# Altium PCB ECG BT&USB 12ch Ver.2.02.PcbDoc (part 1 of 2)
Units mil, origin at the board's own origin, x right, y up, seen from the top; angles counter-clockwise.
Board outline 2150 x 3445 mil, 4 copper layers (Top Layer, Mid-Layer 1, Mid-Layer 2, Bottom Layer), stack 58.2 mil thick; 151 components, 108 nets, 584 pads, 430 vias.
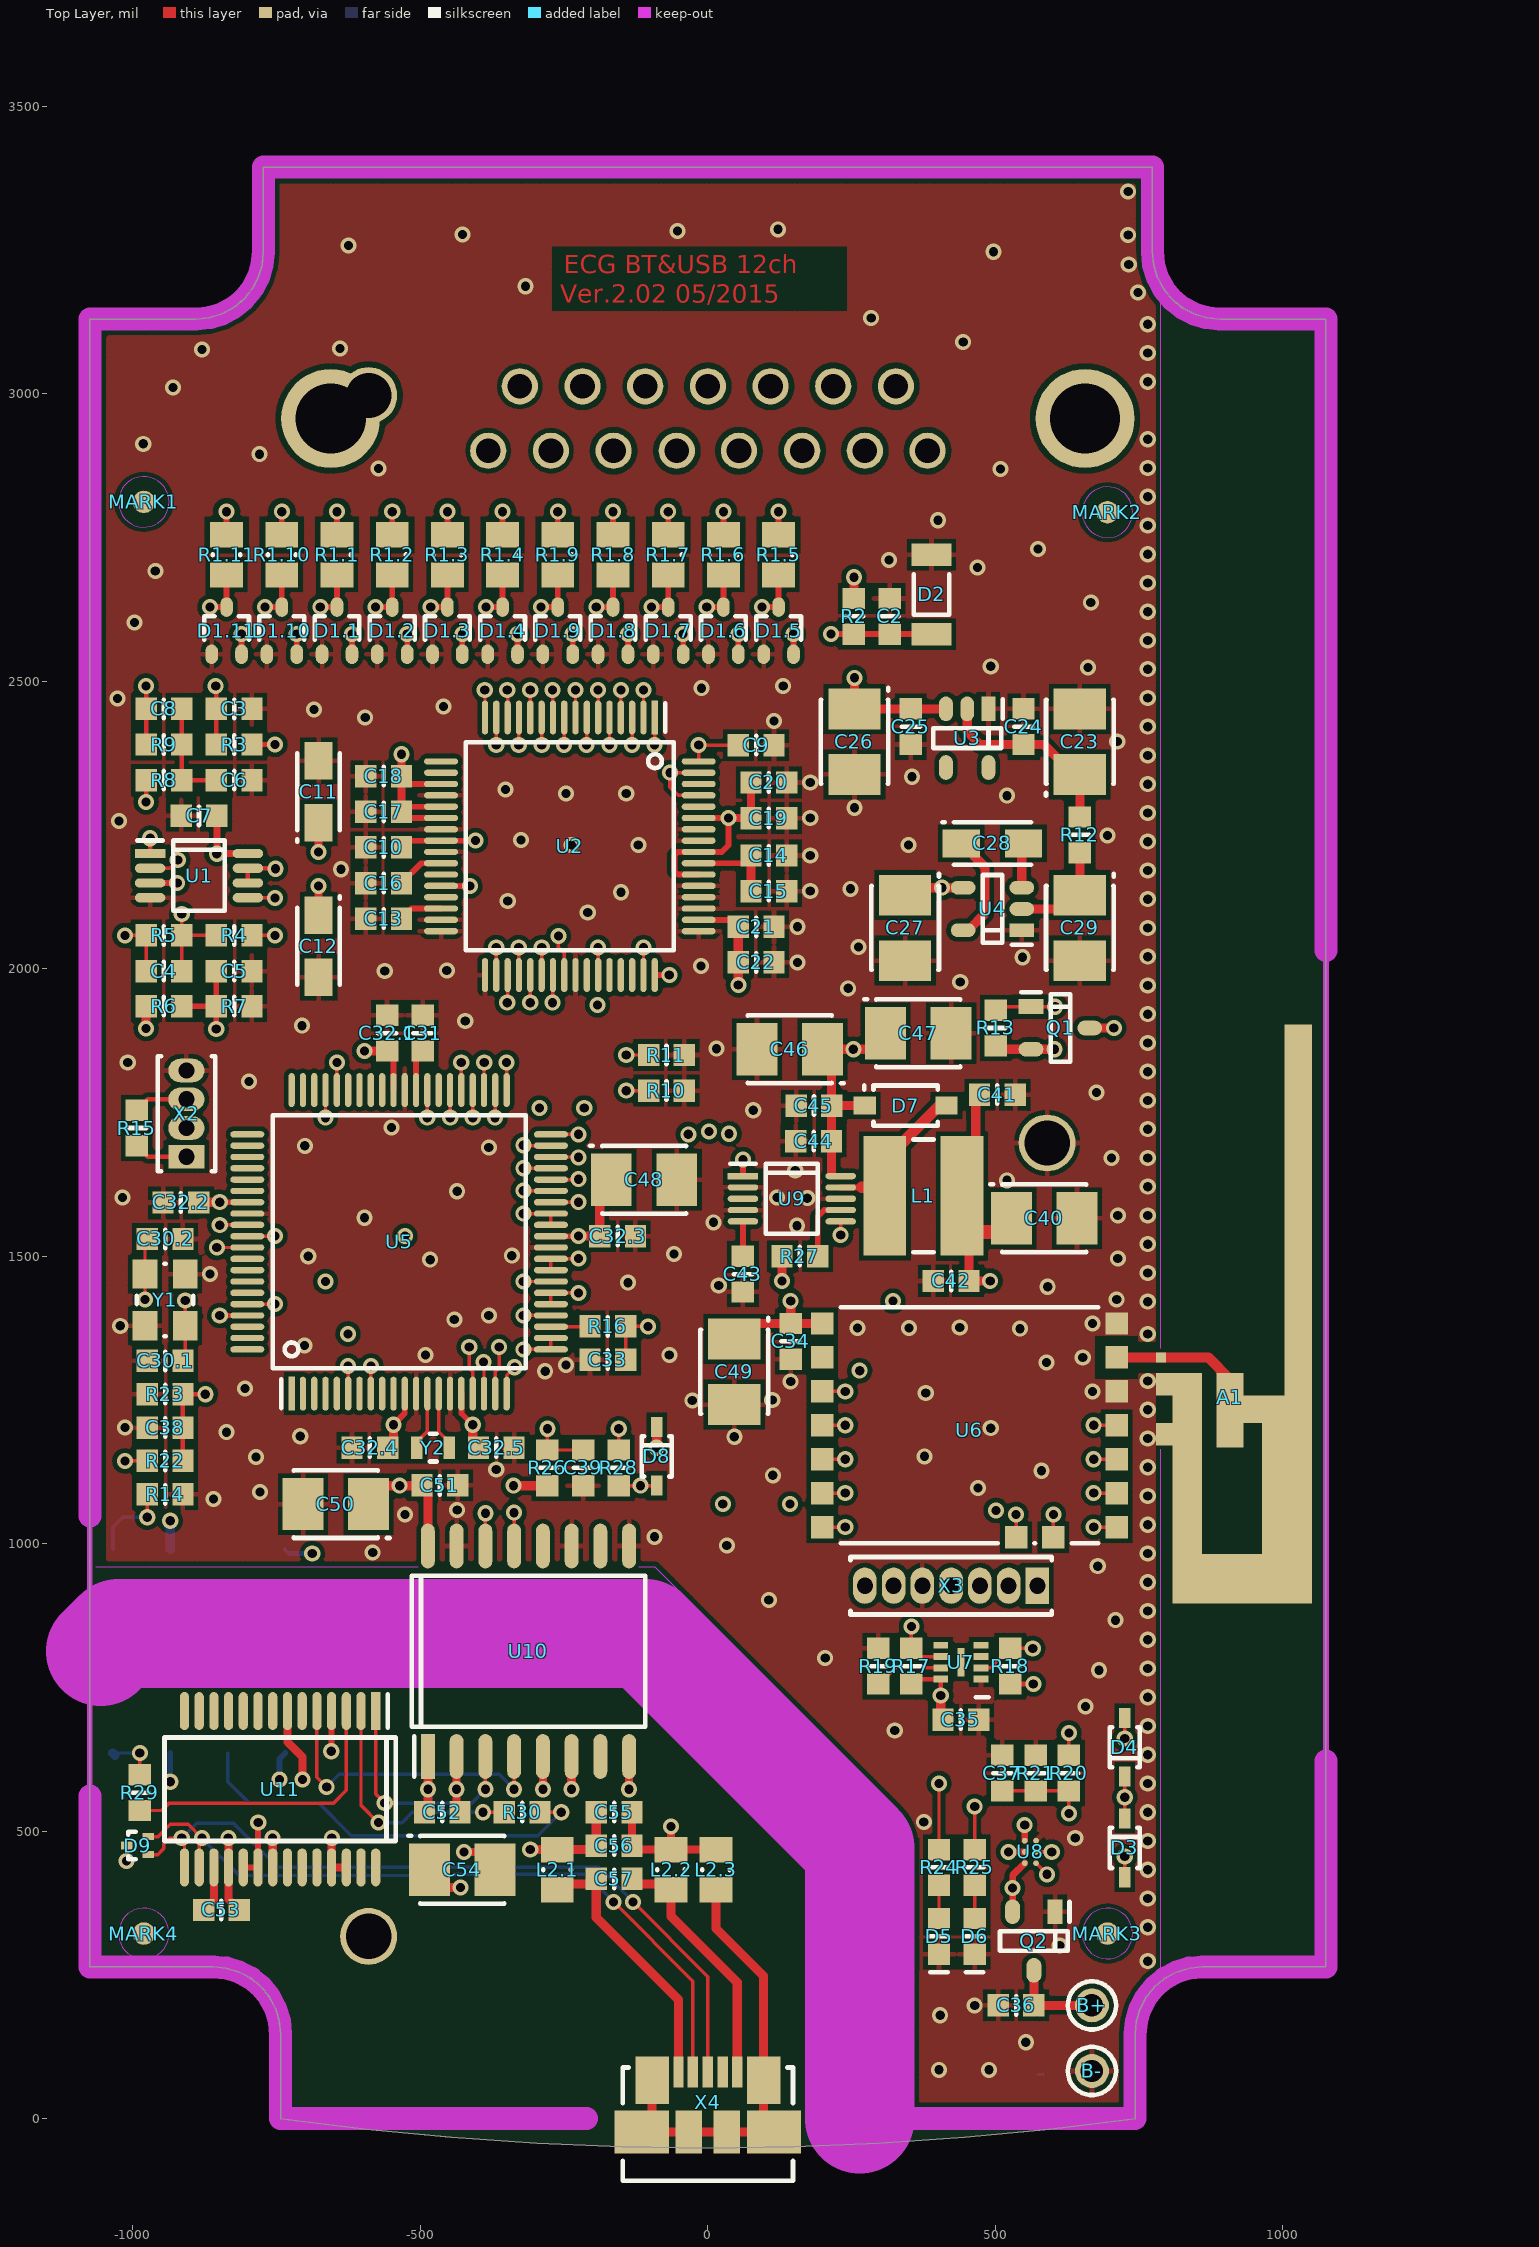
[diagram p0: Top Layer view]
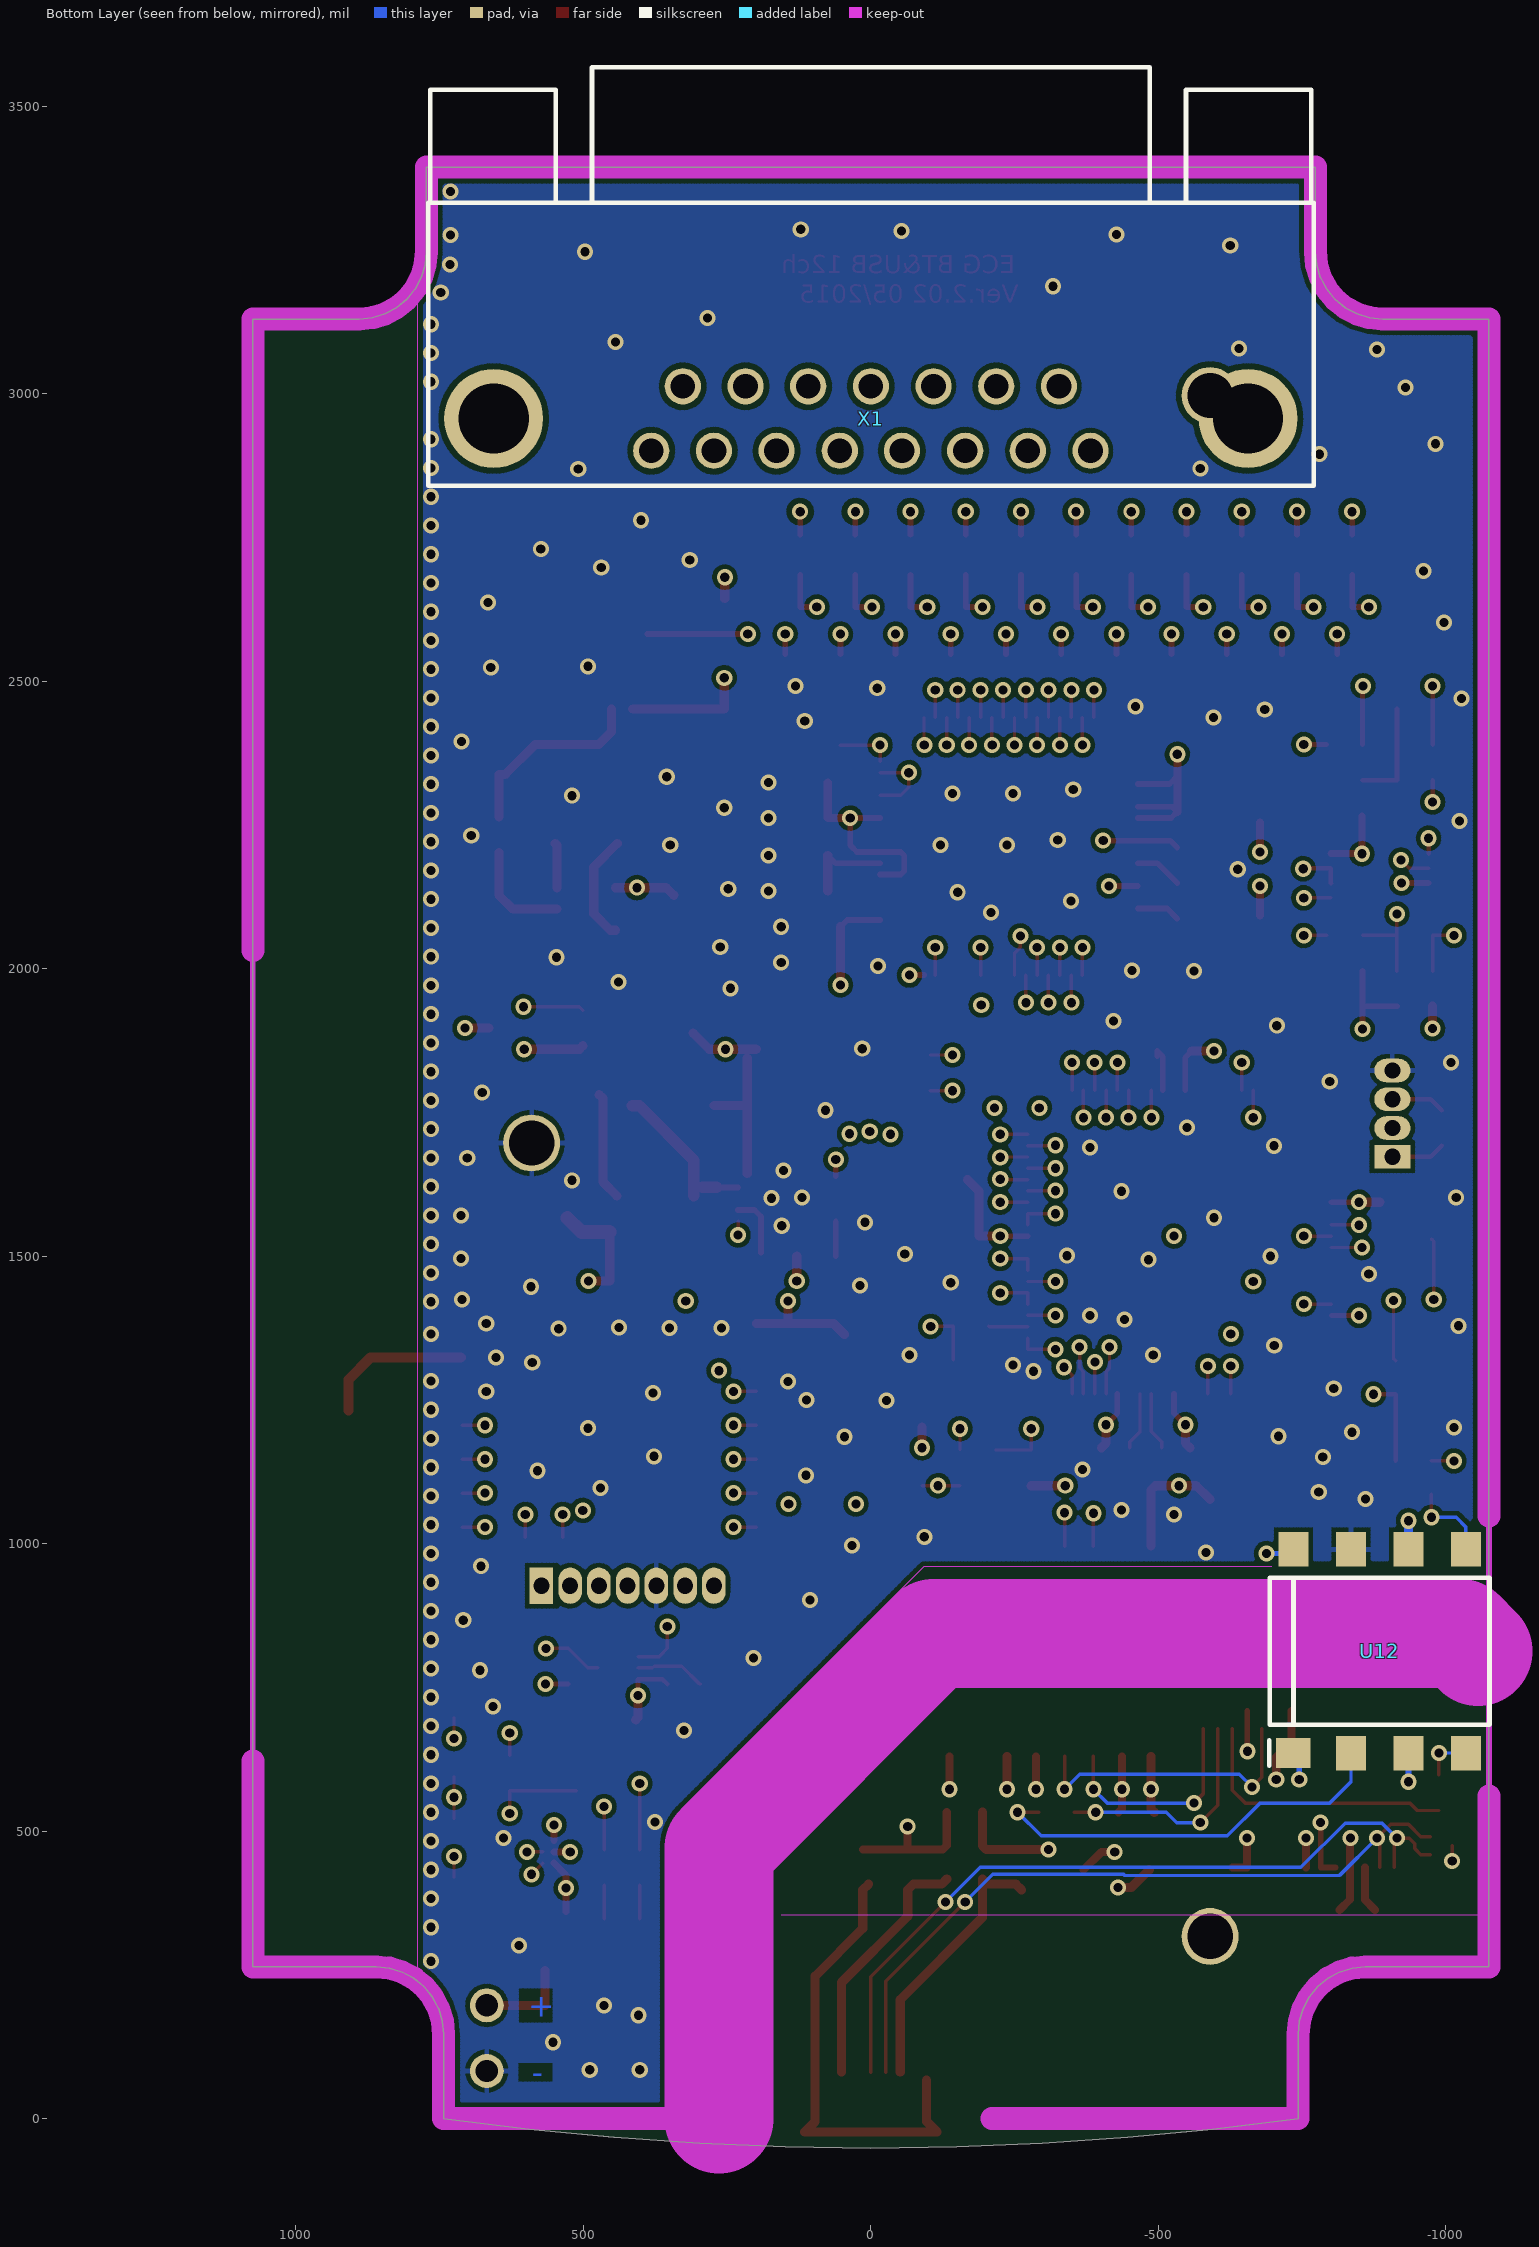
[diagram p1: Bottom Layer view, seen from below]
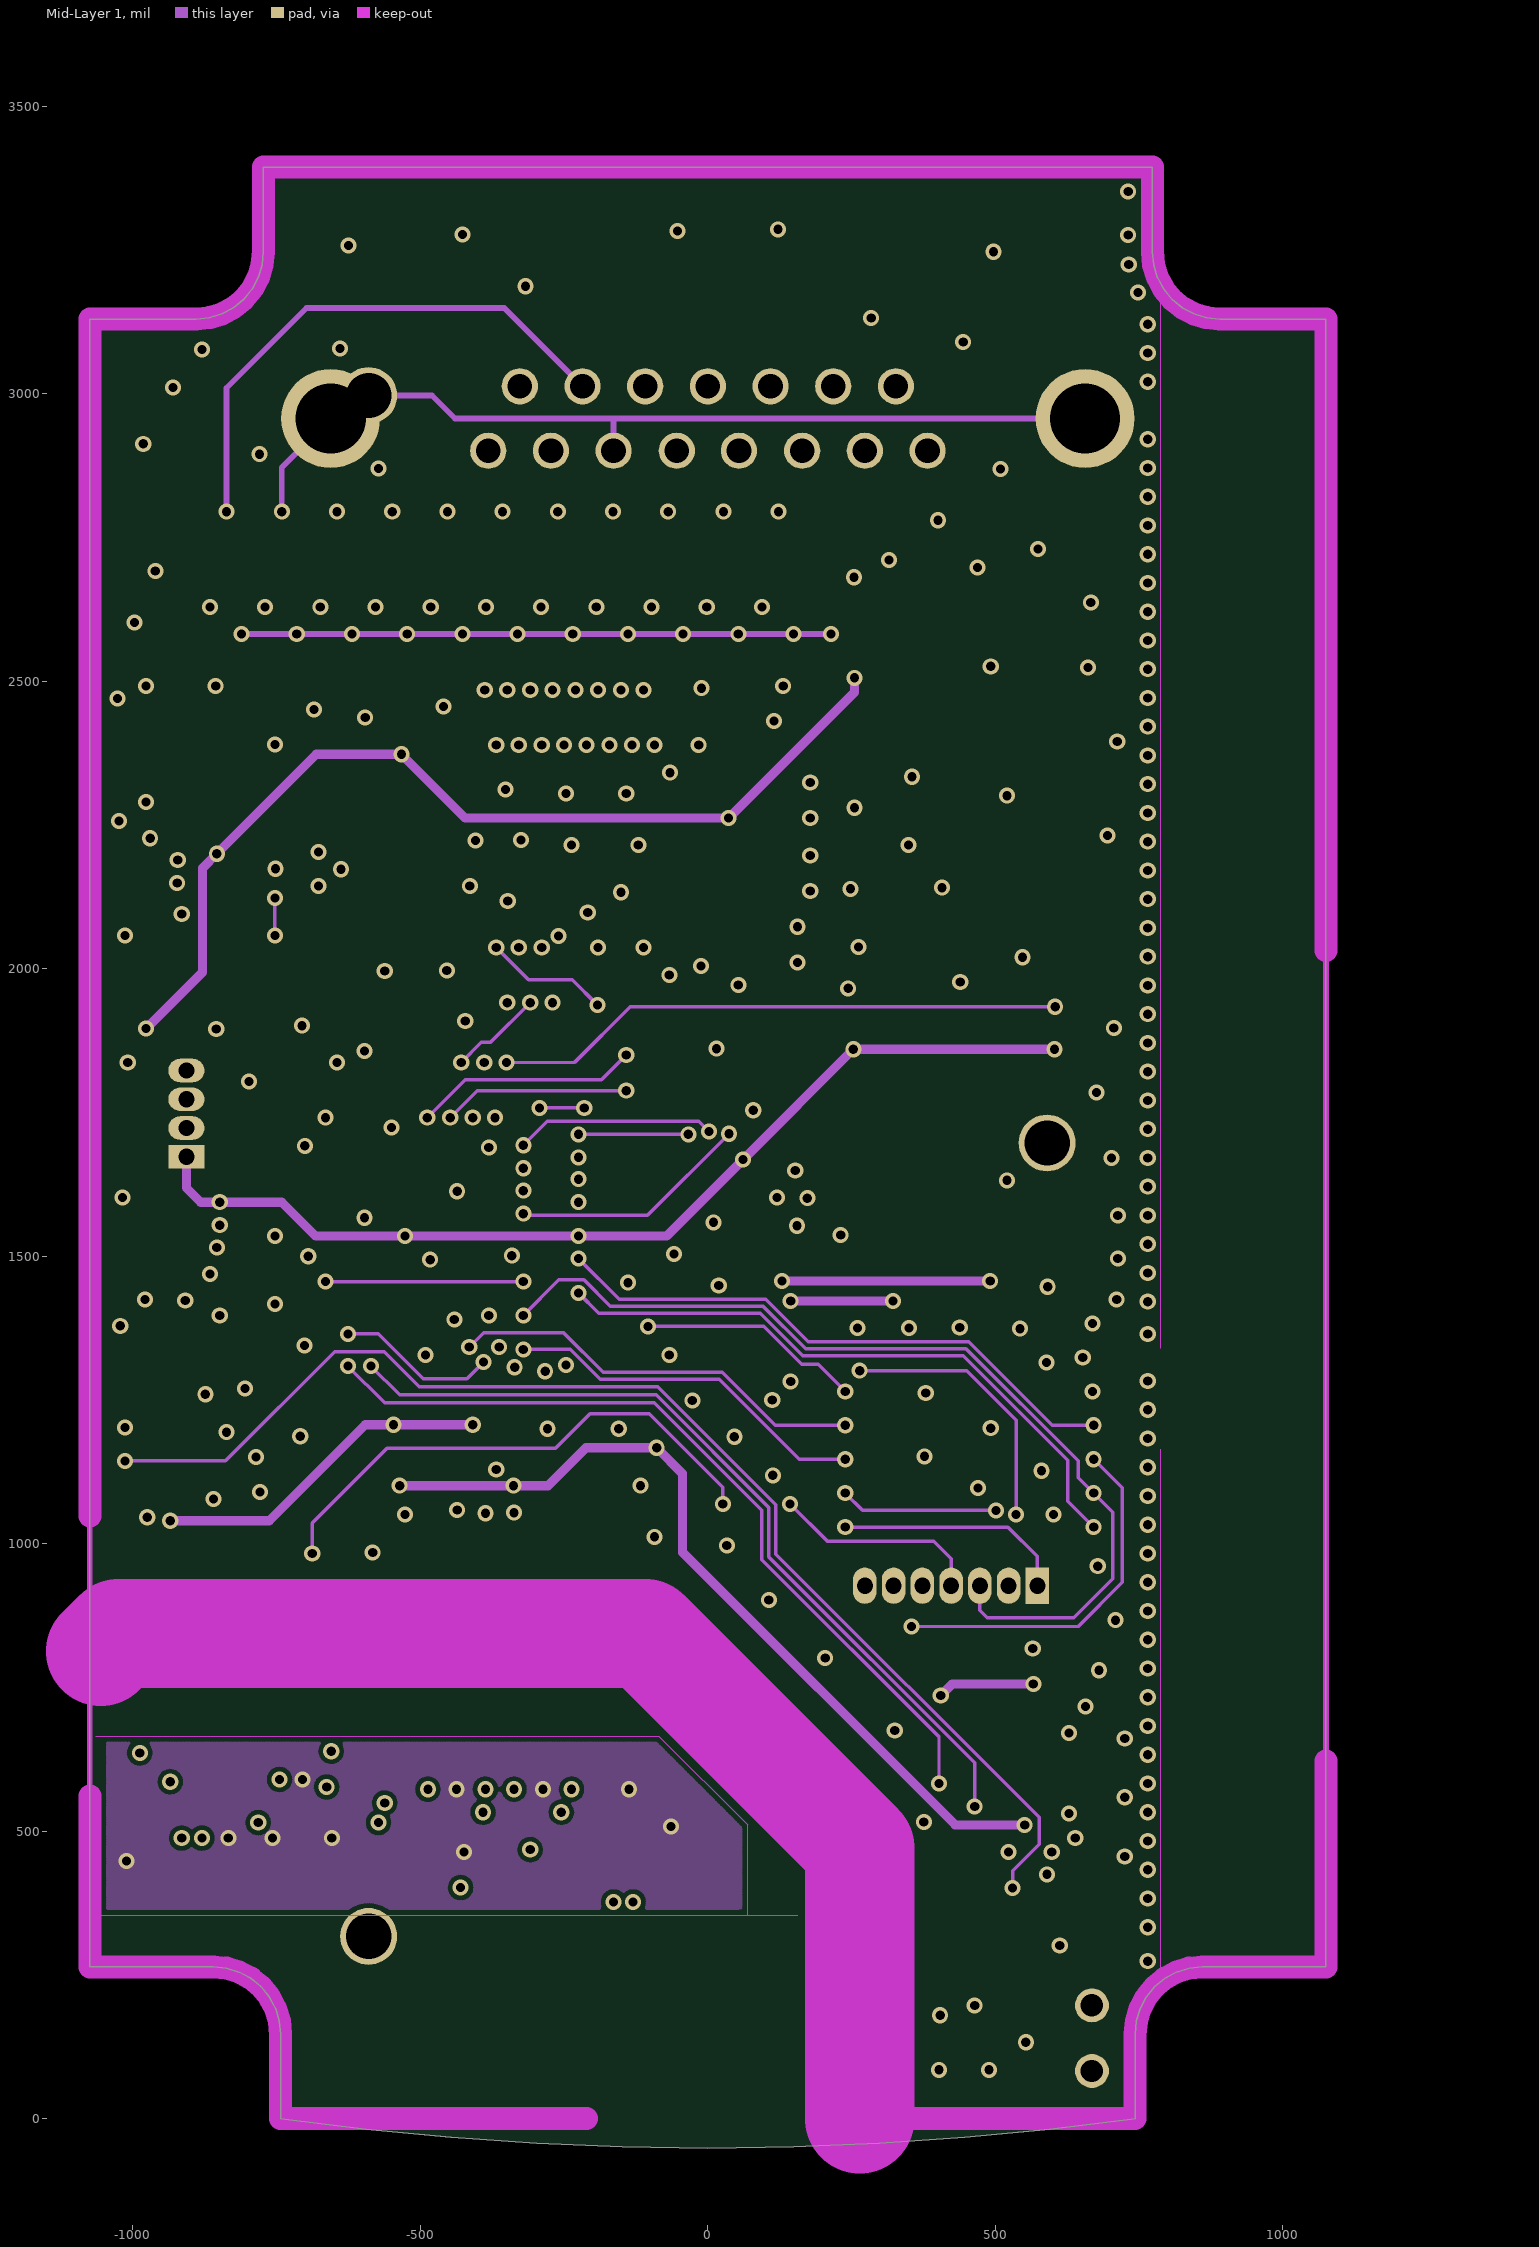
[diagram p2: Mid-Layer 1]
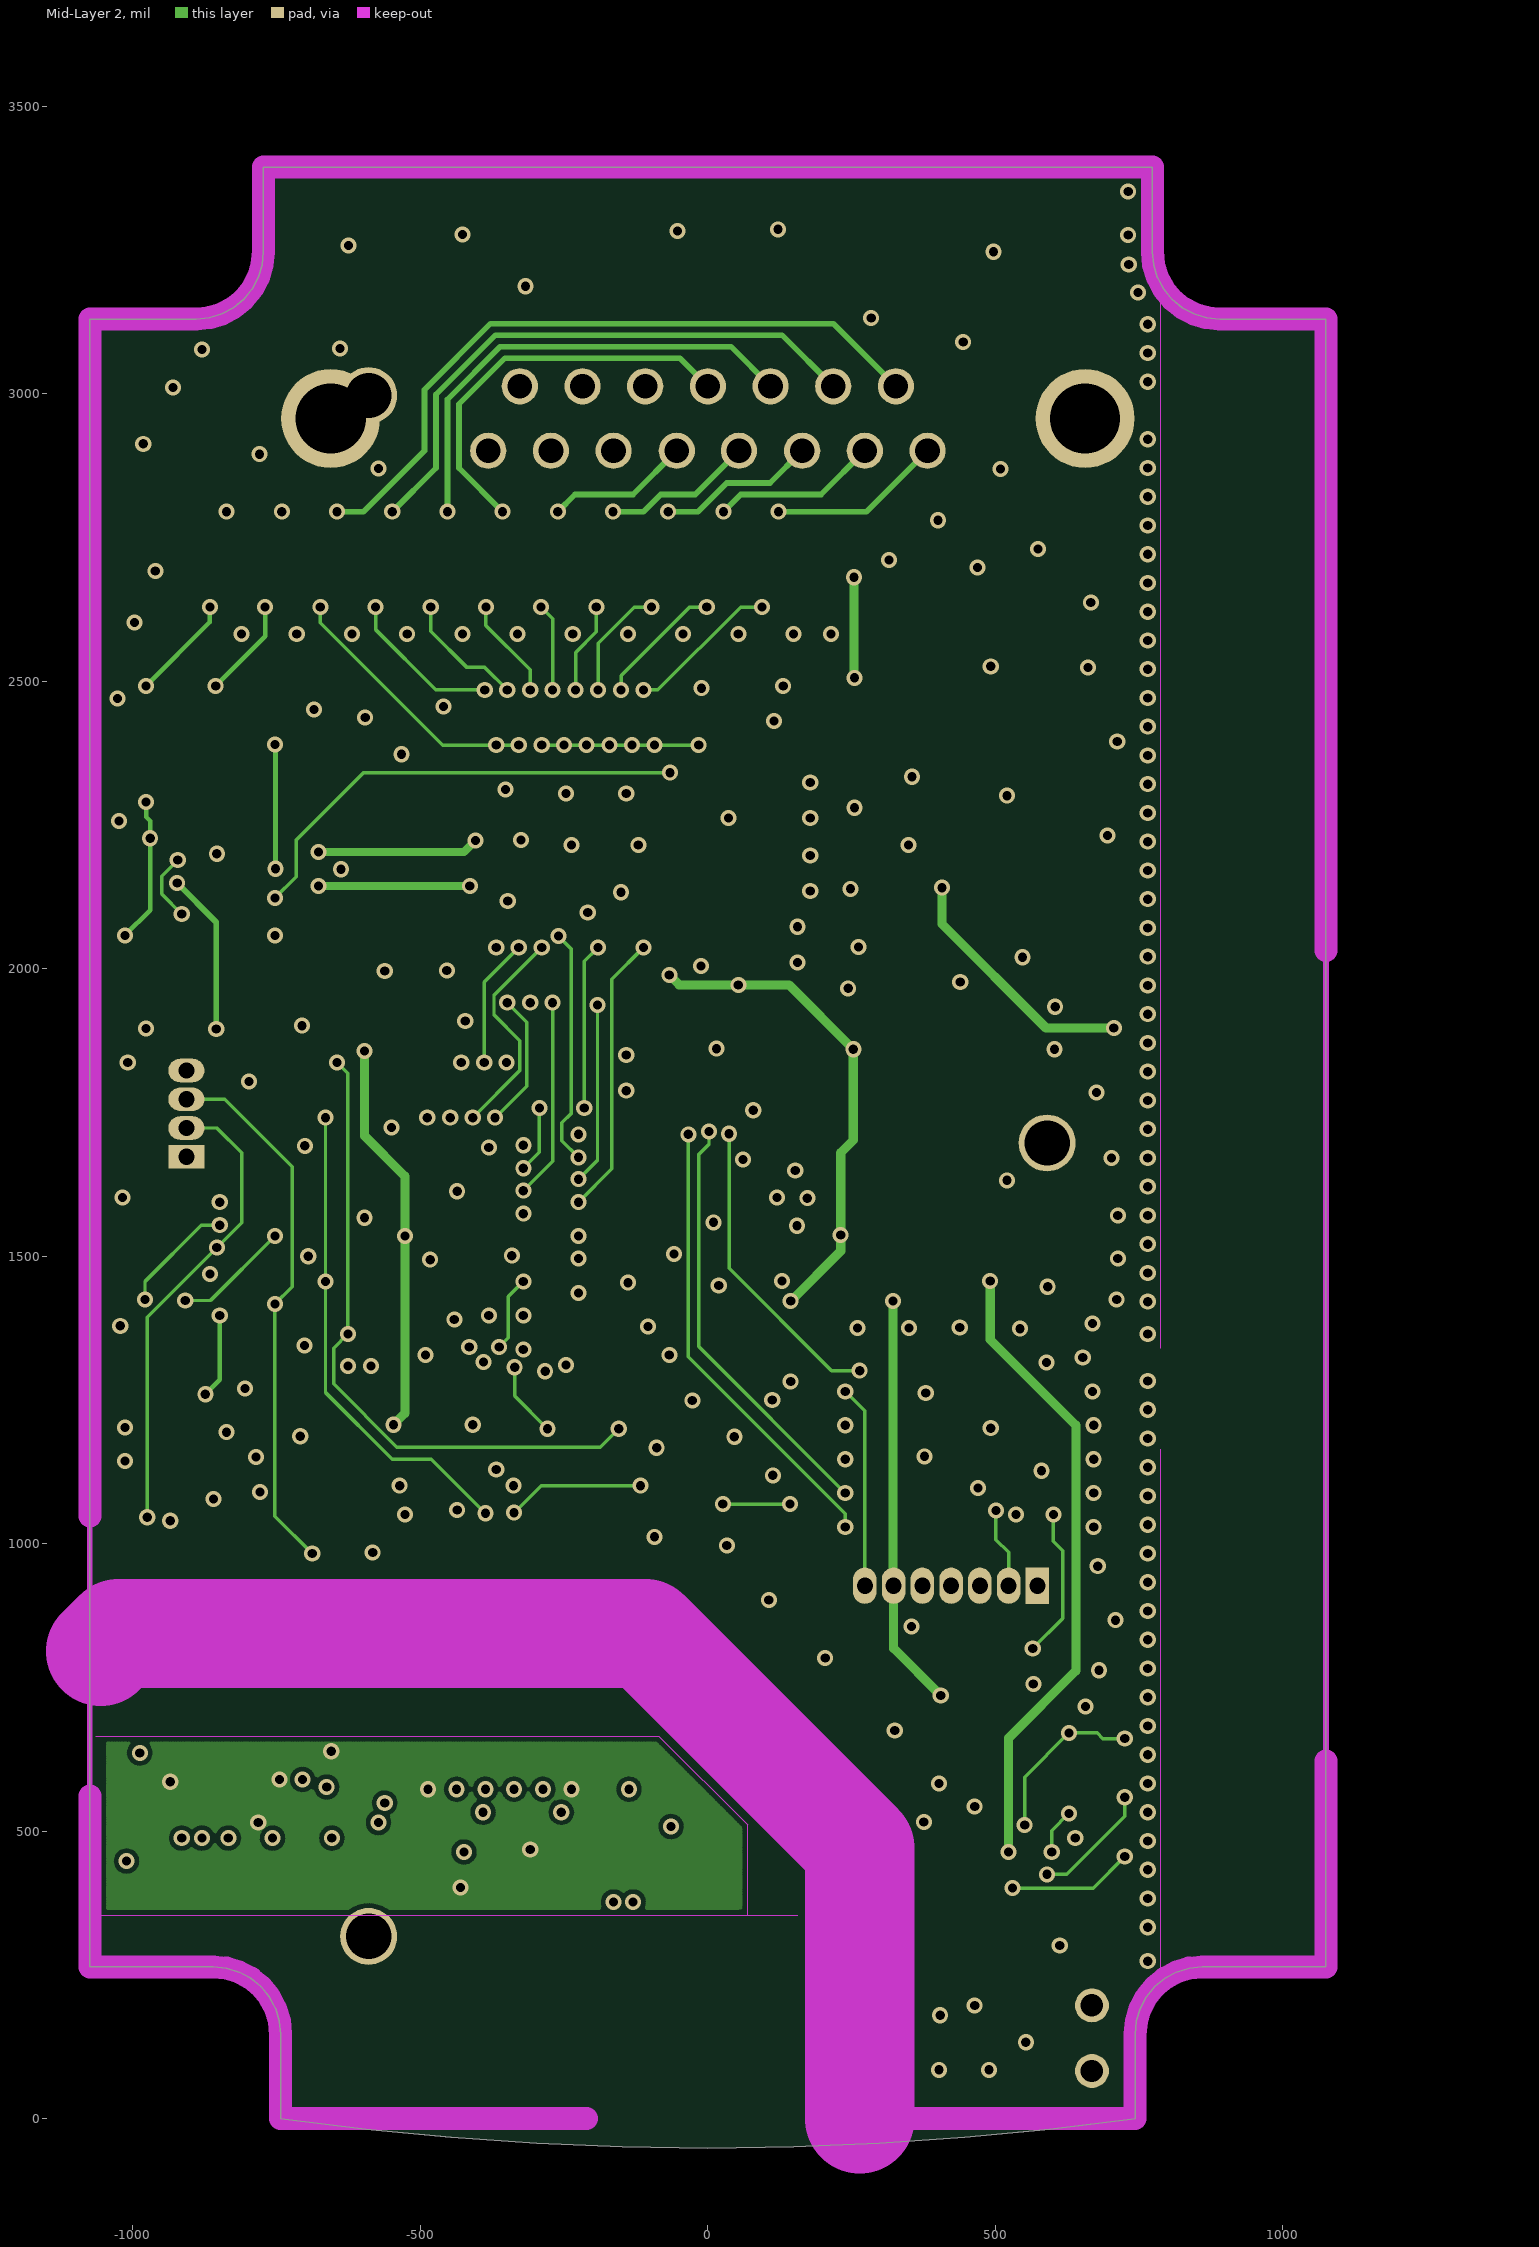
[diagram p3: Mid-Layer 2]
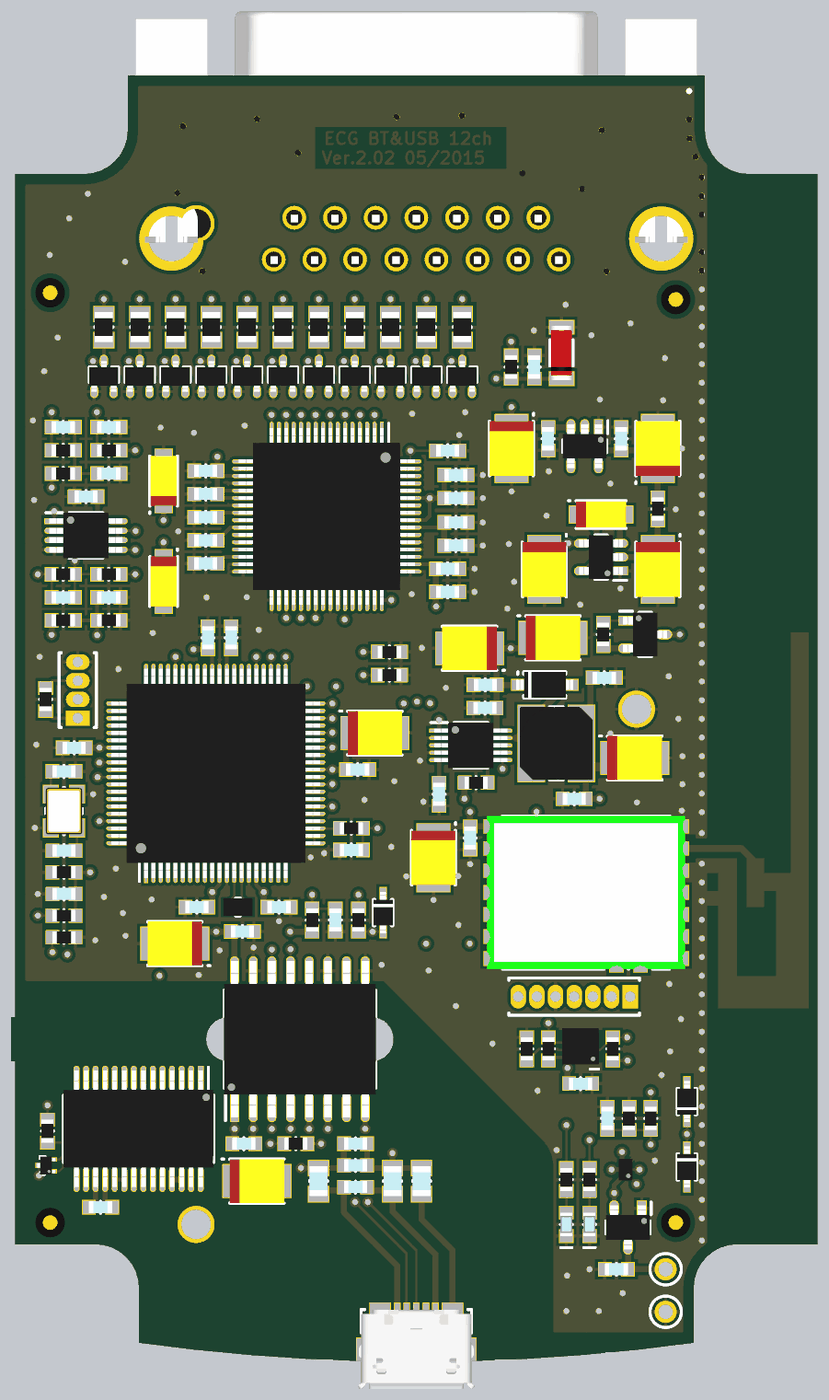
[diagram p5: 3D render of the assembled board from above, using the file's embedded part models]

## Layer stack, top to bottom
Top Layer: signal copper 1.4
Dielectric: core 17, FR-4, Dk 4.8
Mid-Layer 1: signal copper 1.4
Dielectric: prepreg 18.6, FR-4, Dk 4.8
Mid-Layer 2: signal copper 1.4
Dielectric: core 17, FR-4, Dk 4.8
Bottom Layer: signal copper 1.4

## Board outline
-773,3394 -773,3247 -775.25,3224.17 -781.91,3202.23 -792.72,3182 -807.27,3164.27 -825,3149.72 -845.23,3138.91 -867.18,3132.25 -890,3130 -1075,3130 -1075,264 -860,264 -837.18,261.75 -815.23,255.09 -795,244.28 -777.27,229.73 -762.72,212 -751.91,191.77 -745.25,169.82 -743,147 -743,0 -595.07,-18.34 -446.7,-32.62 -297.98,-42.83 -149.05,-48.96 0,-51 149.05,-48.96 297.98,-42.83 446.69,-32.62 595.07,-18.34 743,0 743,147 745.25,169.82 751.91,191.77 762.72,212 777.27,229.73 795,244.28 815.23,255.09 837.17,261.75 860,264 1075,264 1075,3130 890,3130 867.17,3132.25 845.23,3138.91 825,3149.72 807.27,3164.27 792.72,3182 781.91,3202.23 775.25,3224.17 773,3247 773,3394
cut-out: -1086,872 -705,872 -694,871 -683,868 -672,862 -663,855 -656,846 -650,835 -647,824 -646,813 -647,800 -651,788 -656,780 -662,772 -672,764 -681,759 -694,755 -705,754 -1086,754
cut-out: -504,872 -516,871 -528,867 -537,862 -546,855 -553,846 -559,835 -562,823 -563,813 -562,800 -558,789 -553,780 -546,771 -537,764 -526,758 -515,755 -504,754 -120,754 -109,755 -98,758 -88,763 -79,770 -72,778 -66,789 -62,800 -61,813 -62,824 -65,835 -71,846 -80,857 -89,863 -98,868 -109,871 -120,872

## Design rules (kind name [scope] priority, off if disabled: settings)
Clearance ClearanceRF [InNetClass('RFnet') vs InNamedPolygon('TOPGND')] p1: gap=18
Clearance ClearanceIN [InNetClass('INnet')] p2: gap=10
Clearance ClearanceOUT [InNetClass('OUTnet')] p3: gap=8
Clearance ClearancePoligon [InPolygon] p4: gap=8
Clearance [All] p5: gap=6
HoleSize [All] p1: absolutevalues=TRUE maxlimit=1000 minlimit=16 maxpercent=80.000 minpercent=20.000
HoleToHoleClearance [All] p1: gap=0 allowstackedmicrovias=TRUE
MinimumSolderMaskSliver [All] p1: minsoldermaskwidth=6
PolygonConnect PolygonConnectBGA [HasFootprint('SMD/BGA6/1.46x0.96MM/0.5MMP/0.25MMBALL/0.625MMH')] p1: connectstyle=Relief reliefconductorwidth=10 reliefentries=4 polygonreliefangle="45 Angle" airgapwidth=10
PolygonConnect PolygonConnecAnt [(InPadClass('RF GND'))] p2: connectstyle=Direct reliefconductorwidth=10 reliefentries=4 polygonreliefangle="90 Angle" airgapwidth=10
PolygonConnect [(InPadClass('All Pads'))] p3: connectstyle=Relief reliefconductorwidth=8 reliefentries=4 polygonreliefangle="90 Angle" airgapwidth=8
PolygonConnect PolygonConnectVia [All] p4: connectstyle=Direct reliefconductorwidth=10 reliefentries=4 polygonreliefangle="90 Angle" airgapwidth=10
RoomDefinition "RLD and screen" [InComponentClass('RLD and screen')] p1: confinementstyle=ConfineIn formatcopy=TRUE lockcomponents=FALSE outline -738,1881 -738,2517 -1028,2517 -1028,1881
RoomDefinition "Input protect power" [InComponentClass('Input protect power')] p2: confinementstyle=ConfineIn formatcopy=TRUE lockcomponents=FALSE outline 224,2552 434,2552 434,2750 224,2750
RoomDefinition "Input protect 11" [InComponentClass('Input protect 11')] p3: confinementstyle=ConfineIn formatcopy=TRUE lockcomponents=FALSE outline -886,2522 -788,2522 -788,2809 -886,2809
RoomDefinition "Input protect 10" [InComponentClass('Input protect 10')] p4: confinementstyle=ConfineIn formatcopy=TRUE lockcomponents=FALSE outline -790,2522 -692,2522 -692,2809 -790,2809
RoomDefinition "Input protect 9" [InComponentClass('Input protect 9')] p5: confinementstyle=ConfineIn formatcopy=TRUE lockcomponents=FALSE outline -310,2522 -212,2522 -212,2809 -310,2809
RoomDefinition "Input protect 8" [InComponentClass('Input protect 8')] p6: confinementstyle=ConfineIn formatcopy=TRUE lockcomponents=FALSE outline -214,2522 -116,2522 -116,2809 -214,2809
RoomDefinition "Input protect 7" [InComponentClass('Input protect 7')] p7: confinementstyle=ConfineIn formatcopy=TRUE lockcomponents=FALSE outline -118,2522 -20,2522 -20,2809 -118,2809
RoomDefinition "Input protect 6" [InComponentClass('Input protect 6')] p8: confinementstyle=ConfineIn formatcopy=TRUE lockcomponents=FALSE outline -22,2522 76,2522 76,2809 -22,2809
RoomDefinition "Input protect 5" [InComponentClass('Input protect 5')] p9: confinementstyle=ConfineIn formatcopy=TRUE lockcomponents=FALSE outline 74,2522 172,2522 172,2809 74,2809
RoomDefinition "Input protect 4" [InComponentClass('Input protect 4')] p10: confinementstyle=ConfineIn formatcopy=TRUE lockcomponents=FALSE outline -406,2522 -308,2522 -308,2809 -406,2809
RoomDefinition "Input protect 3" [InComponentClass('Input protect 3')] p11: confinementstyle=ConfineIn formatcopy=TRUE lockcomponents=FALSE outline -502,2522 -404,2522 -404,2809 -502,2809
RoomDefinition "Input protect 2" [InComponentClass('Input protect 2')] p12: confinementstyle=ConfineIn formatcopy=TRUE lockcomponents=FALSE outline -598,2522 -500,2522 -500,2809 -598,2809
RoomDefinition "Input protect 1" [InComponentClass('Input protect 1')] p13: confinementstyle=ConfineIn formatcopy=TRUE lockcomponents=FALSE outline -694,2522 -596,2522 -596,2809 -694,2809
RoutingVias [All] p1: holewidth=28 width=50 viastyle="Through Hole" minholewidth=16 minwidth=28 maxholewidth=80 maxwidth=100
SilkToSilkClearance [All] p1: silktosilkclearance=8
SilkToSolderMaskClearance [IsPad] p1: minsilkscreentomaskgap=8 clearancetoexposedcopper=TRUE
SolderMaskExpansion [All] p1: expansion=4
Width WidthIN [InNetClass('INnet')] p1: maxlimit=10 minlimit=10 preferedwidth=10
Width [All] p2: maxlimit=100 minlimit=6 preferedwidth=6
23 further rules are at their usual default settings.

## Classes and differential pairs
net class OUTnet: FOUT LOUT NOUT ROUT SCOUT V1OUT V2OUT V3OUT V4OUT V5OUT V6OUT
net class INnet: NetR1.1_1 NetR1.2_1 NetR1.3_1 NetR1.4_1 NetR1.5_1 NetR1.6_1 NetR1.7_1 NetR1.8_1 NetR1.9_1 NetR1.10_1 NetR1.11_1
component class "Main 12ch": MARK1 MARK2 MARK3 MARK4
component class "Input connector 12ch": X1
channel class "Input protect": "Input protect 1" "Input protect 2" "Input protect 3" "Input protect 4" "Input protect 5" "Input protect 6" "Input protect 7" "Input protect 8" "Input protect 9" "Input protect 10" "Input protect 11"
component class "RLD and screen": C3 C4 C5 C6 C7 C8 R3 R4 R5 R6 R7 R8 R9 U1
component class Processor: C30.1 C30.2 C31 C32.1 C32.2 C32.3 C32.4 C32.5 R14 R15 U5 X2 Y1 Y2
component class "Input protect power": C2 D2 R2
component class "Input protect 11": D1.11 R1.11
component class "Input protect 10": D1.10 R1.10
component class "Input protect 9": D1.9 R1.9
component class "Input protect 8": D1.8 R1.8
component class "Input protect 7": D1.7 R1.7
component class "Input protect 6": D1.6 R1.6
component class "Input protect 5": D1.5 R1.5
component class "Input protect 4": D1.4 R1.4
component class "Input protect 3": D1.3 R1.3
component class "Input protect 2": D1.2 R1.2
component class "Input protect 1": D1.1 R1.1
component class "ECG 12ch": C9 C10 C11 C12 C13 C14 C15 C16 C17 C18 C19 C20 C21 C22 R10 R11 U2
component class "Analog power": C23 C24 C25 C26 C27 C28 C29 Q1 R12 R13 U3 U4
component class Bluetooth: A1 C33 C34 C35 R16 R17 R18 R19 U6 U7 X3
component class USB: C50 C51 C52 C53 C54 C55 C56 C57 D8 D9 L2.1 L2.2 L2.3 R28 R29 R30 U10 U11 U12 X4
net class POWER: 5VIZO GND_IZO NetC53_2 NetC57_1 NetC57_2 NetL2.3_2
component class Power: B+ B- C36 C37 C38 C39 C40 C41 C42 C43 C44 C45 C46 C47 C48 C49 D3 D4 D5 D6 D7 L1 Q2 R20 R21 R22 R23 R24 R25 R26 R27 U8 U9
pad class "RF GND": A1-2 U6-5 U6-7
net class RFnet: NetA1_1

## Components (designator, comment, footprint, x,y, rotation, side; value= is the part's Value field where it differs from the comment)
A1 "F antenna" "PCB INVERTED F ANTENNA MIRROR" 1051,896 r270 top net-tie
B+ "TH HOLE" "1.0MM PAD" 668,197 r0 top
B- "TH HOLE" "1.0MM PAD" 668,83 r0 top
C2 "0.1u" SMD/C/0603 316,2613 r270 top
C3 "0.1u" SMD/C/0603 -824,2452 r180 top
C4 "10p" SMD/C/0603 -946,1996 r0 top
C5 "0.1u" SMD/C/0603 -824,1996 r180 top
C6 "0.1u" SMD/C/0603 -824,2328 r180 top
C7 "0.1u" SMD/C/0603 -885,2266 r0 top
C8 "0.1u" SMD/C/0603 -946,2452 r0 top
C9 "100p" SMD/C/0603 84,2389 r0 top
C10 "0.1u" SMD/C/0603 -564,2211 r0 top
C11 "22u 6.3V" SMD/C/TAJ-A -677,2308 r90 top
C12 "22u 6.3V" SMD/C/TAJ-A -677,2039 r270 top
C13 "1u" SMD/C/0603 -564,2087 r0 top
C14 "1u" SMD/C/0603 106,2197 r180 top
C15 "0.1u" SMD/C/0603 106,2135 r180 top
C16 "1u" SMD/C/0603 -564,2149 r0 top
C17 "0.1u" SMD/C/0603 -564,2273 r0 top
C18 "1u" SMD/C/0603 -564,2335 r0 top
C19 "0.1u" SMD/C/0603 106,2262 r180 top
C20 "1u" SMD/C/0603 106,2324 r180 top
C21 "0.1u" SMD/C/0603 84,2073 r180 top
C22 "1u" SMD/C/0603 84,2011 r180 top
C23 "47u 10V" SMD/C/TAJ-B 647,2395 r90 top
C24 "0.1u" SMD/C/0603 549,2421 r270 top
C25 "0.1u" SMD/C/0603 353,2421 r90 top
C26 "47u 10V" SMD/C/TAJ-B 255,2395 r270 top
C27 "47u 10V" SMD/C/TAJ-B 343,2071 r270 top
C28 "22u 6.3V" SMD/C/TAJ-A 495,2218 r0 top
C29 "47u 10V" SMD/C/TAJ-B 647,2071 r270 top
C30.1 "10p" SMD/C/0603 -944,1318 r0 top
C30.2 "10p" SMD/C/0603 -944,1530 r180 top
C31 "1u" SMD/C/0603 -496,1888 r270 top
C32.1 "0.1u" SMD/C/0603 -558,1888 r270 top
C32.2 "0.1u" SMD/C/0603 -916.5,1593.5 r0 top
C32.3 "0.1u" SMD/C/0603 -157,1535 r180 top
C32.4 "0.1u" SMD/C/0603 -588,1167 r0 top
C32.5 "0.1u" SMD/C/0603 -368,1167 r180 top
C33 "0.1u" SMD/C/0603 -174,1320 r0 top
C34 "1u" SMD/C/0603 144,1352 r90 top
C35 "0.1u" SMD/C/0603 440,694 r180 top
C36 "1u" SMD/C/0603 536,197 r0 top
C37 "2n" SMD/C/0603 512,601 r270 top
C38 "0.1u" SMD/C/0603 -944,1202 r0 top
C39 "10n" SMD/C/0603 -217,1132 r90 top
C40 "47u 10V" SMD/C/TAJ-B 585,1566 r0 top
C41 "1u" SMD/C/0603 503.5,1781 r180 top
C42 "0.1u" SMD/C/0603 423,1457 r0 top
C43 "0.1u" SMD/C/0603 61,1469 r270 top
C44 "0.1u" SMD/C/0603 184,1700 r0 top
C45 "1u" SMD/C/0603 184.5,1762 r0 top
C46 "47u 10V" SMD/C/TAJ-B 142.5,1860 r180 top
C47 "47u 10V" SMD/C/TAJ-B 366,1888 r0 top
C48 "47u 10V" SMD/C/TAJ-B -111,1633 r0 top
C49 "47u 10V" SMD/C/TAJ-B 46,1299 r270 top
C50 "47u 10V" SMD/C/TAJ-B -647,1069 r180 top
C51 "0.1u" SMD/C/0603 -466,1101.5 r180 top
C52 "0.1u" SMD/C/0603 -462,533 r180 top
C53 "0.1u" SMD/C/0603 -846,363 r180 top
C54 "47u 10V" SMD/C/TAJ-B -427,433 r0 top
C55 "0.1u" SMD/C/0603 -163,533 r180 top
C56 "10n" SMD/C/0603 -163,475 r180 top
C57 "10n" SMD/C/0603 -163,417 r180 top
D1.1 "BAV99W" SMD/SOT323 -645,2588 r90 top (schematic designator D1)
D1.2 "BAV99W" SMD/SOT323 -549,2588 r90 top (schematic designator D1)
D1.3 "BAV99W" SMD/SOT323 -453,2588 r90 top (schematic designator D1)
D1.4 "BAV99W" SMD/SOT323 -357,2588 r90 top (schematic designator D1)
D1.5 "BAV99W" SMD/SOT323 123,2588 r90 top (schematic designator D1)
D1.6 "BAV99W" SMD/SOT323 27,2588 r90 top (schematic designator D1)
D1.7 "BAV99W" SMD/SOT323 -69,2588 r90 top (schematic designator D1)
D1.8 "BAV99W" SMD/SOT323 -165,2588 r90 top (schematic designator D1)
D1.9 "BAV99W" SMD/SOT323 -261,2588 r90 top (schematic designator D1)
D1.10 "BAV99W" SMD/SOT323 -741,2588 r90 top (schematic designator D1)
D1.11 "BAV99W" SMD/SOT323 -837,2588 r90 top (schematic designator D1)
D2 "BZV55-C5V6" SMD/SOD-80C 389,2651 r90 top
D3 "1N4148WS" SMD/SOD-323 725,471 r270 top
D4 "1N4148WS" SMD/SOD-323 725,646 r90 top
D5 "BLUE" SMD/LED/0603 402,317 r90 top
D6 "GREEN" SMD/LED/0603 464,317 r90 top
D7 "MBR0520L" SMD/SOD-123 344,1762 r0 top
D8 "1N4148WS" SMD/SOD-323 -89,1152 r270 top
D9 "ESD7L5.0DT5G" SMD/SOT723 -992,475 r180 top
L1 "CDRH4D18NP-220NC" SMD\L\SUMIDA\CDRH4D18 375,1605 r180 top
L2.1 "BLM21PG221SN1D" SMD/C/0805 -262,433 r270 top
L2.2 "BLM21PG221SN1D" SMD/C/0805 -64,433 r270 top
L2.3 "BLM21PG221SN1D" SMD/C/0805 14,433 r270 top
MARK1 "Value" "1MM MARK" -981,2812 r90 top
MARK2 "Value" "1MM MARK" 695,2794 r90 top
MARK3 "Value" "1MM MARK" 695,322 r90 top
MARK4 "Value" "1MM MARK" -981,322 r90 top
Q1 "IRLML6402" SMD/SOT23 613,1897 r0 top
Q2 "IRLML6402" SMD/SOT23 567,309 r270 top
R1.1 "100R" SMD/R/0805 -645,2720 r270 top (schematic designator R1)
R1.2 "100R" SMD/R/0805 -549,2720 r270 top (schematic designator R1)
R1.3 "100R" SMD/R/0805 -453,2720 r270 top (schematic designator R1)
R1.4 "100R" SMD/R/0805 -357,2720 r270 top (schematic designator R1)
R1.5 "100R" SMD/R/0805 123,2720 r270 top (schematic designator R1)
R1.6 "100R" SMD/R/0805 27,2720 r270 top (schematic designator R1)
R1.7 "100R" SMD/R/0805 -69,2720 r270 top (schematic designator R1)
R1.8 "100R" SMD/R/0805 -165,2720 r270 top (schematic designator R1)
R1.9 "100R" SMD/R/0805 -261,2720 r270 top (schematic designator R1)
R1.10 "100R" SMD/R/0805 -741,2720 r270 top (schematic designator R1)
R1.11 "100R" SMD/R/0805 -837,2720 r270 top (schematic designator R1)
R2 "3k" SMD/R/0603 254,2613 r90 top
R3 "3k" SMD/R/0603 -824,2390 r180 top
R4 "15k" SMD/R/0603 -824,2058 r180 top
R5 "300k" SMD/R/0603 -946,2058 r180 top
R6 "300k" SMD/R/0603 -946,1935 r180 top
R7 "300k" SMD/R/0603 -824,1935 r180 top
R8 "3k" SMD/R/0603 -946,2328 r0 top
R9 "130k" SMD/R/0603 -946,2390 r180 top
R10 "15k" SMD/R/0603 -72,1788 r180 top
R11 "15k" SMD/R/0603 -72,1850 r180 top
R12 "27R" SMD/R/0603 647,2233 r90 top
R13 "1.5M" SMD/R/0603 501,1897 r90 top
R14 "3k" SMD/R/0603 -944,1086 r0 top
R15 "3k" SMD/R/0603 -993,1723 r270 top
R16 "3k" SMD/R/0603 -174,1378 r180 top (schematic designator R15)
R17 "2.2k" SMD/R/0603 354,787 r270 top
R18 "2.2k" SMD/R/0603 526,787 r270 top
R19 "2.2k" SMD/R/0603 296,787 r90 top
R20 "15k" SMD/R/0603 628,601 r270 top
R21 "15k" SMD/R/0603 570,601 r90 top
R22 "130k" SMD/R/0603 -944,1144 r180 top
R23 "130k" SMD/R/0603 -944,1260 r180 top
R24 "3k" SMD/R/0603 402,437 r270 top
R25 "3k" SMD/R/0603 464,437 r270 top
R26 "15k" SMD/R/0603 -279,1132 r270 top
R27 "200R" SMD/R/0603 160,1500 r0 top
R28 "15k" SMD/R/0603 -155,1132 r90 top
R29 "3k" SMD/R/0603 -988,567 r90 top
R30 "3k" SMD/R/0603 -323,533 r0 top
U1 "OP2177ARM" SMD/SOP8/0.65MMP/3x3mm/4.9MMWP -885,2162 r0 top
U2 "ADS1298IPAGR" SMD/QFP64/0.5MMP/10X10MM/12X12MMWP -240,2213 r270 top
U3 "MC78LC50NTR" SMD/SOT23-5 451,2401 r270 top
U4 "MAX1683EUK" SMD/SOT23-5 495,2104 r180 top
U5 "MSP430F5418AIPN" SMD/QFP80/0.5MMP/12x12MM/14X14MMWP -537,1525 r90 top
U6 "BT32" BT32 455,1206 r180 top
U7 "Apple MFI 2.0C" "Apple MFI 2.0C" 440,794 r180 top
U8 "FPF1320" SMD/BGA6/1.46X0.96MM/0.5MMP/0.25MMBALL/0.625MMH 561,464 r90 top
U9 "MAX1676EUB" SMD/SOP10/0.5MMP/3x3MM/4.9MMWP 146,1600 r0 top
U10 "ADuM6201CRWZ" SMD/SOIC16/1.27MMP/7.5x10.3mm/10.6MMWP -312,813 r90 top
U11 "FT232RL" SMD/SOP28/0.65MMP/5.3x10.2mm/7.9MMWP -744,573 r270 top
U12 "LTV-827S" SMD/DIP8/2.54MMP/9.68x6.5MM/10.16MMWP -885,813 r90 bottom (schematic designator U13)
X1 "DRB-15F" DRB-15F 0,3332 r180 bottom
X2 "4 pin IDC" CONNECTOR/IDC/0.05P/1X4 -907,1748 r90 top
X3 "CONNECTOR 7X1" CONNECTOR/IDC/0.05P/1X7 423,927 r180 top
X4 "47346-0001" 47346-0001 0,-108 r0 top
Y1 "KX-7 24.576MHz" KX-7 -944,1424 r90 top
Y2 "KX-327RT" KX–327RT -478,1167 r0 top

## Footprints (in the part's own frame and the unit in brackets; to place one, negate y for a bottom-side part, rotate by r counter-clockwise, add the part's x,y. Pads: shape width x height; smd on the part's side, far side on the other; paste and mask are expansions set on the pad)
"1.0MM PAD" [mil]
  round 59 hole 39 paste+0 mask+0: 1(0,0)
  silkscreen extent -42,-42 42,42
"1MM MARK" [mil]
  round 39 smd paste-39 mask+20: 1(0,0)
  Top Layer keep-out circle w0: c0,0 r44
47346-0001 [mil] "MicroUSB Type B"
  rect 18x54 smd paste-2 mask+0: 1(-51,189) 2(-26,189) 3(0,189) 4(26,189) 5(51,189)
  rect 94x75 smd paste-2 mask+0: CASE(-115,85) CASE(115,85)
  rect 58x83 smd paste-2 mask+0: CASE(-97,175) CASE(97,175)
  rect 46x75 smd paste-2 mask+0: CASE(-33,85) CASE(33,85)
  silkscreen extent -148,0 148,197, body extent -157,-17 157,197, height 106
"Apple MFI 2.0C" [mil]
  rect 26x12 smd paste-1 mask+0: 1(-35,29.5) 2(-35,9.8) 3(-35,-9.8) 4(-35,-29.5) 5(35,-29.5) 6(35,-9.8) 7(35,9.8) 8(35,29.5)
  rect 12x50 smd paste+0 mask-1: PPDAD(0,0)
  silkscreen extent -48,61 -26,61, body extent -49,-49 49,49, height 24
BT32 [mil]
  rect 39x39 smd paste-2 mask+0: 1(-256,177) 2(-256,118) 3(-256,59) 4(-256,0) 5(-256,-59) 6(-256,-118) 7(-256,-177) 8(256,-177) 9(256,-118) 10(256,-59) 11(256,0) 12(256,59) 13(256,118) 14(256,177) 15(-81,195) 16(-146,195)
  silkscreen extent -224,-205 224,205, body extent -266,-205 266,205, height 87
CONNECTOR/IDC/0.05P/1X4 [mil]
  rect 41x63 hole 28 paste-2 mask+0: 1(-75,0)
  oval 41x63 hole 28 paste-2 mask+0: 2(-25,0) 3(25,0) 4(75,0)
  silkscreen extent -100,-50 100,50
CONNECTOR/IDC/0.05P/1X7 [mil]
  rect 41x63 hole 28 paste-2 mask+0: 1(-150,0)
  oval 41x63 hole 28 paste-2 mask+0: 2(-100,0) 3(-50,0) 4(0,0) 5(50,0) 6(100,0) 7(150,0)
  silkscreen extent -175,-50 175,50
DRB-15F [mil] "D-SUB male PCB mount"
  round 63 hole 43 paste+0 mask+0: 1(-382,-431) 2(-273,-431) 3(-164,-431) 4(-54,-431) 5(54,-431) 6(164,-431) 7(273,-431) 8(382,-431) 9(-327,-319) 10(-218,-319) 11(-109,-319) 12(0,-319) 13(109,-319) 14(218,-319) 15(327,-319)
  round 172 hole 122 paste+0 mask+0: H1(-656,-375) H2(656,-375)
  silkscreen extent -770,-492 770,236, body extent -771,-487 770,233, height 495
KX-7 [mil] "Geyer Quartz Crystal"
  rect 51x43 smd paste-2 mask+0: 1(-45,-35) 2(45,-35) 3(45,35) 4(-45,35)
  silkscreen extent -63,-49 63,49, body extent -63,-49 63,49, height 31
KX–327RT [mil] "Geyer Quartz Crystal"
  rect 20x39 smd paste-2 mask+0: 1(-28,0) 2(28,0)
  silkscreen extent -6,-24 6,24, body extent -39,-24 39,24, height 24
"PCB INVERTED F ANTENNA MIRROR" [mil] "TI design Note DN0007"
  rect 18x18 smd paste-9 mask-9: 1(-428,-263)
  rect 665x48 smd paste-24 mask-24: 2(-674.5,-24)
  rect 39x80 smd paste-20 mask-20: 2(-381.5,-232) 2(-294.5,-232)
  rect 48x166 smd paste-24 mask-24: 2(-338,-83)
  rect 130x47 smd paste-24 mask-24: 2(-336,-142.5)
  rect 401x51 smd paste-26 mask-26: 2(-200.5,-217.5)
  rect 362x87 smd paste-44 mask-44: 2(-181,-43.5)
  rect 86x243 smd paste-43 mask-43: 2(-43,-121.5)
  Top Layer lines w18: -428,-263 -428,-181 -389.5,-142.5 -336,-142.5
SMD/BGA6/1.46X0.96MM/0.5MMP/0.25MMBALL/0.625MMH [mil]
  round 10 smd paste+0 mask+0: A1(-19.6,-9.8) A2(-19.6,9.8) B1(0,-9.8) B2(0,9.8) C1(19.6,-9.8) C2(19.6,9.8)
  body extent -29,-19 29,19, height 25
SMD/C/0603 [mil] "SMD capacitor 0603"
  rect 37x39 smd paste-2 mask+0: 1(-31,0) 2(31,0)
  silkscreen extent 0,-16 0,16, body extent -31,-16 31,16, height 32
SMD/C/0805 [mil] "SMD capacitor 0805"
  rect 44x57 smd paste-2 mask+0: 1(-35,0) 2(35,0)
  silkscreen extent -1,-24 1,24, body extent -40,-24 40,24, height 32
SMD/C/TAJ-A [mil] "SMD capacitor TAJ-A"
  rect 65x49 smd paste-2 mask+0: M(54,0) P(-54,0)
  silkscreen extent -87,-37 67,37, body extent -67,-35 67,35, height 70
SMD/C/TAJ-B [mil] "SMD capacitor TAJ-B"
  rect 71x91 smd paste-2 mask+0: M(57,0) P(-57,0)
  silkscreen extent -94,-59 73,59, body extent -73,-59 73,59, height 82
SMD/DIP8/2.54MMP/9.68x6.5MM/10.16MMWP [mil]
  rect 52x60 smd paste-2 mask+0: 1(-177,150)
  rect 60x52 smd paste-2 mask+0: 2(-177,50) 3(-177,-50) 4(-177,-150) 5(177,-150) 6(177,-50) 7(177,50) 8(177,150)
  silkscreen extent -199,-191 128,192, body extent -200,-190 200,191, height 157
SMD/LED/0603 [mil] "SMD LED 0603"
  rect 37x39 smd paste-2 mask+0: A(31,0) C(-31,0)
  silkscreen extent -62,-16 0,16, body extent -31,-16 31,16, height 31
SMD/QFP64/0.5MMP/10X10MM/12X12MMWP [mil] "JEDEC MS-026"
  rect 59x11 smd paste-2 mask+0: 1(-224,147.6)
  oval 59x11 smd paste-2 mask+0: 2(-224,128) 3(-224,108.3) 4(-224,88.6) 5(-224,68.9) 6(-224,49.2) 7(-224,29.5) 8(-224,9.8) 9(-224,-9.8) 10(-224,-29.5) 11(-224,-49.2) 12(-224,-68.9) 13(-224,-88.6) 14(-224,-108.3) 15(-224,-128) 16(-224,-147.6) 33(224,-147.6) 34(224,-128) 35(224,-108.3) 36(224,-88.6) 37(224,-68.8) 38(224,-49.2) 39(224,-29.5) 40(224,-9.8) 41(224,9.8) 42(224,29.5) 43(224,49.2) 44(224,68.9) 45(224,88.6) 46(224,108.3) 47(224,128) 48(224,147.6)
  oval 11x59 smd paste-2 mask+0: 17(-147.6,-224) 18(-128,-224) 19(-108.3,-224) 20(-88.6,-224) 21(-68.9,-224) 22(-49.2,-224) 23(-29.5,-224) 24(-9.8,-224) 25(9.8,-224) 26(29.5,-224) 27(49.2,-224) 28(68.9,-224) 29(88.6,-224) 30(108.3,-224) 31(128,-224) 32(147.6,-224) 49(147.6,224) 50(128,224) 51(108.3,224) 52(88.6,224) 53(68.9,224) 54(49.2,224) 55(29.5,224) 56(9.8,224) 57(-9.8,224) 58(-29.5,224) 59(-49.2,224) 60(-68.9,224) 61(-88.6,224) 62(-108.3,224) 63(-128,224) 64(-147.6,224)
  silkscreen extent -249,-181 181,181, body extent -236,-236 236,236, height 47
SMD/QFP80/0.5MMP/12x12MM/14X14MMWP [mil] "JEDEC MS-026BDD"
  rect 59x11 smd paste-2 mask+0: 1(-264,187)
  oval 59x11 smd paste-2 mask+0: 2(-264,167.3) 3(-264,147.6) 4(-264,128) 5(-264,108.3) 6(-264,88.6) 7(-264,68.9) 8(-264,49.2) 9(-264,29.5) 10(-264,9.8) 11(-264,-9.8) 12(-264,-29.5) 13(-264,-49.2) 14(-264,-68.9) 15(-264,-88.6) 16(-264,-108.3) 17(-264,-128) 18(-264,-147.6) 19(-264,-167.3) 20(-264,-187) 41(264,-187) 42(264,-167.3) 43(264,-147.6) 44(264,-128) 45(264,-108.3) 46(264,-88.6) 47(264,-68.8) 48(264,-49.2) 49(264,-29.5) 50(264,-9.8) 51(264,9.8) 52(264,29.5) 53(264,49.2) 54(264,68.9) 55(264,88.6) 56(264,108.3) 57(264,128) 58(264,147.6) 59(264,167.3) 60(264,187)
  oval 11x59 smd paste-2 mask+0: 21(-187,-264) 22(-167.3,-264) 23(-147.6,-264) 24(-128,-264) 25(-108.3,-264) 26(-88.6,-264) 27(-68.9,-264) 28(-49.2,-264) 29(-29.5,-264) 30(-9.8,-264) 31(9.8,-264) 32(29.5,-264) 33(49.2,-264) 34(68.9,-264) 35(88.6,-264) 36(108.3,-264) 37(128,-264) 38(147.6,-264) 39(167.3,-264) 40(187,-264) 61(187,264) 62(167.3,264) 63(147.6,264) 64(128,264) 65(108.3,264) 66(88.6,264) 67(68.9,264) 68(49.2,264) 69(29.5,264) 70(9.8,264) 71(-9.8,264) 72(-29.5,264) 73(-49.2,264) 74(-68.9,264) 75(-88.6,264) 76(-108.3,264) 77(-128,264) 78(-147.6,264) 79(-167.3,264) 80(-187,264)
  silkscreen extent -289,-220 220,220, body extent -280,-280 280,280, height 62
SMD/R/0603 [mil] "SMD resistor 0603"
  rect 37x39 smd paste-2 mask+0: 1(-31,0) 2(31,0)
  silkscreen extent 0,-16 0,16, body extent -31,-16 31,16, height 16
SMD/R/0805 [mil] "SMD resistor 0805"
  rect 44x57 smd paste-2 mask+0: 1(-35,0) 2(35,0)
  silkscreen extent -1,-24 1,24, body extent -40,-24 40,24, height 20
SMD/SOD-80C [mil] "SMD SOD-80C (MELF)"
  rect 39x69 smd paste-2 mask+0: A(69,0) C(-69,0)
  silkscreen extent -35,-31 35,31, body extent -73,-31 73,31, height 62
SMD/SOD-123 [mil] "SMD SOD-123"
  rect 39x31 smd paste-2 mask+0: A(71,0) C(-71,0)
  silkscreen extent -72,-35 56,35, body extent -76,-35 76,35, height 53
SMD/SOD-323 [mil] "SMD SOD-323"
  rect 35x20 smd paste-2 mask+0: A(51,0) C(-51,0)
  silkscreen extent -35,-26 35,26, body extent -55,-26 55,26, height 43
SMD/SOIC16/1.27MMP/7.5x10.3mm/10.6MMWP [mil] "JEDEC MS-013AA"
  rect 78x24 smd paste-2 mask+0: 1(-183,175)
  oval 78x24 smd paste-2 mask+0: 2(-183,125) 3(-183,75) 4(-183,25) 5(-183,-25) 6(-183,-75) 7(-183,-125) 8(-183,-175) 9(183,-175) 10(183,-125) 11(183,-75) 12(183,-25) 13(183,25) 14(183,75) 15(183,125) 16(183,175)
  silkscreen extent -218,-203 131,203, body extent -209,-203 209,203, height 104
SMD/SOP8/0.65MMP/3x3mm/4.9MMWP [mil] "JEDEC MO-187AA"
  rect 53x16 smd paste-2 mask+0: 1(-85,38.4)
  oval 53x16 smd paste-2 mask+0: 2(-85,12.8) 3(-85,-12.8) 4(-85,-38.4) 5(85,-38.4) 6(85,-12.8) 7(85,12.8) 8(85,38.4)
  silkscreen extent -107,-61 45,61, body extent -98,-61 98,61, height 44
SMD/SOP10/0.5MMP/3x3MM/4.9MMWP [mil] "JEDEC MO-187BA"
  rect 53x11 smd paste-2 mask+0: 1(-85,39.4)
  oval 53x11 smd paste-2 mask+0: 2(-85,19.7) 3(-85,0) 4(-85,-19.7) 5(-85,-39.4) 6(85,-39.4) 7(85,-19.7) 8(85,0) 9(85,19.7) 10(85,39.4)
  silkscreen extent -107,-61 45,61, body extent -98,-61 98,61, height 44
SMD/SOP28/0.65MMP/5.3x10.2mm/7.9MMWP [mil] "JEDEC MO-150"
  rect 66x16 smd paste-2 mask+0: 1(-136,166.3)
  oval 66x16 smd paste-2 mask+0: 2(-136,140.7) 3(-136,115.2) 4(-136,89.6) 5(-136,64) 6(-136,38.4) 7(-136,12.8) 8(-136,-12.8) 9(-136,-38.4) 10(-136,-64) 11(-136,-89.6) 12(-136,-115.2) 13(-136,-140.7) 14(-136,-166.3) 15(136,-166.3) 16(136,-140.7) 17(136,-115.2) 18(136,-89.6) 19(136,-64) 20(136,-38.4) 21(136,-12.8) 22(136,12.8) 23(136,38.4) 24(136,64) 25(136,89.6) 26(136,115.2) 27(136,140.7) 28(136,166.3)
  silkscreen extent -165,-201 90,201, body extent -156,-201 156,201, height 79
SMD/SOT23 [mil] "SOT23"
  rect 43x26 smd paste-2 mask+0: 1(-51,37)
  oval 43x26 smd paste-2 mask+0: 2(-51,-37) 3(51,0)
  silkscreen extent -68,-59 17,62, body extent -59,-59 59,59, height 56
SMD/SOT23-5 [mil] "SOT23-5 (JEDEC MO-178 MO-178AA)"
  rect 43x24 smd paste-2 mask+0: 1(-51,37)
  oval 43x24 smd paste-2 mask+0: 2(-51,0) 3(-51,-37) 4(51,-37) 5(51,37)
  silkscreen extent -68,-59 17,62, body extent -59,-59 59,59, height 56
SMD/SOT323 [mil] "SOT23"
  oval 34x22 smd paste-2 mask+0: 1(-41,26) 2(-41,-26) 3(41,0)
  silkscreen extent -16,-39 25,39, body extent -41,-39 41,39, height 43
SMD/SOT723 [mil] "SOT723"
  rect 20x12 smd paste-2 mask+0: 1(-19,15.7) 2(-19,-15.7)
  rect 20x14 smd paste-2 mask+0: 3(19,0)
  silkscreen extent 3,-24 16,24, body extent -24,-24 24,24, height 20
SMD\L\SUMIDA\CDRH4D18 [mil]
  rect 74x208 smd paste-2 mask+0: 1(-67,0) 2(67,0)
  silkscreen extent -18,-98 18,98, body extent -98,-98 98,98, height 79

## Part data
A1: library part "F Antenna"
C2 C3 C4 C5 C6 C7 C8 C9 C10 C13 C14 C15 C16 C17 C18 C19 C20 C21 C22 C24 C25 C30.1 C30.2 C31 C32.1 C32.2 C32.3 C32.4 C32.5 C33 C34 C35 C36 C37 C38 C39 C41 C42 C43 C44 C45 C51 C52 C53 C55 C56 C57: library part Capacitor
C11 C12 C23 C26 C27 C28 C29 C40 C46 C47 C48 C49 C50 C54: library part "Capacitor Pol"
D1.1 D1.2 D1.3 D1.4 D1.5 D1.6 D1.7 D1.8 D1.9 D1.10 D1.11: library part BAV99
D2: library part Stabilitron
D3 D4 D7 D8: library part Diode
D5 D6: library part LED, "d3mm Ultra Brightness Blue LED"
D9: "ESD Protection Diodes with Ultra?Low Capacitance"
L1: library part CDRH4D
MARK1 MARK2 MARK3 MARK4: library part TP
Q1 Q2: "P-channel HEXFET Power MOSFET"
R1.1 R1.2 R1.3 R1.4 R1.5 R1.6 R1.7 R1.8 R1.9 R1.10 R1.11 R2 R3 R4 R5 R6 R7 R8 R9 R10 R11 R12 R13 R14 R15 R16 R17 R18 R19 R20 R21 R22 R23 R24 R25 R26 R27 R28 R29 R30: library part Resistor
U1: "Precision Low Noise, Low Input Bias Current Operational Amplifiers"
U2: "Interleaving Continuous Conduction Mode PFC Controller"
U3: "Micropower Ultra-Low Quiescent Current Voltage Regulator"
U4: "Switched-Capacitor Voltage Doubler"
U5: "Mixed Signal Microcontroller"
U6: "Bluetooth module"
U7: "Apple Authentication Coprocessor 2.0C"
U8: "Power Switch"
U9: "High-Efficiency, Low-Supply-Current, Compact, Step-Up DC-DC Converters"
U10: library part ADuM6201, "Dual-Channel, 5 kV Isolators with Integrated DC-to-DC Converter"
U11: "USB to RS232 / RS422 / RS485 Converters"
X1: library part "ECG Cable DRB-15F"
X2: library part "MSP430 JTAG SBW", "MSP430 JTAG Connector"
X4: library part "MicroUSB Connector", "USB Connector"
Y1: library part KX-9A, "Quartz Crystal"
Y2: "Quartz Crystal"

## Free pads (board coordinates)
  round 99 hole 79 mask+0: 1(-590,317)
  round 99 hole 79 paste+0 mask+0: 1(-590,2997) 1(590,1697)

## Via types
v1: diameter 28, hole 16, Top Layer to Bottom Layer, tented both sides, 430 vias

## Nets (pads, with @x,y where several pads share a name; then routed paths per layer and width w, separated by ;. In a path a pad name is that pad's centre, name@x,y a point inside that pad or via, vN(x,y) a via of type N, cw(c..) or ccw(c..) an arc to the next point about the centre after c; other vN are vias at no path point)
3.3VD: C21.2 C22.2 C32.1.2 C32.2.2 C32.3.2 C32.4.2 C32.5.2 C34.2 C35.2 C44.2 C45.2 C46.P C47.P C48.P C49.P D7.C Q1.2 R13.1 R15.2 R17.2 R18.2 U2.48 U2.50 U5.11 U5.16 U5.31 U5.51 U5.67 U6.8 U7.8 U9.1 U9.6 U9.10 U12.6 X2.1 X3.6 | length 6785.9
  Top Layer w6: v1(231,1537) U9.6@231,1560.6
  Top Layer w8: R15.2@-993,1692 -974,1673 X2.1@-907,1673 ; R17.2@354,756 362.5,764.5 U7.8@405,764.5 v1(405,736) ; R18.2@526,756 v1(566,756)
  Top Layer w10: v1(-849,1594) -848.9,1593.9 U5.67@-801,1593.9 ; C32.1.2@-558,1857 -546.8,1845.8 U5.51@-546.8,1789 ; v1(-547,1207) -527.2,1226.8 U5.11@-527.2,1261 ; U5.16@-428.7,1261 -428.7,1226.7 v1(-409,1207) ; U5.31@-273,1534.8 -225.2,1534.8 v1(-225,1535) ; U2.48@-92.4,1989 v1(-67,1989) ; U2.50@-16,2085 41,2085 C21.2@53,2073 ; U9.1@61,1639.4 v1(61,1668)
  Top Layer w14: C32.2.2@-885.5,1593.5 C32.2.2@-885,1594
  Top Layer w16: C32.2.2@-885,1594 v1(-849,1594) ; v1(-597,1857) C32.1.2@-558,1857 ; C32.4.2@-555,1167 -547,1175 v1(-547,1207) ; v1(-409,1207) -409,1175 C32.5.2@-401,1167 ; v1(-225,1535) C32.3.2@-188,1535 -188,1613 C48.P@-168,1633 ; C49.P@46,1364 65,1383 C34.2@144,1383 ; v1(53,1972) C22.2@53,2011 C21.2@53,2073 ; v1(144,1422) C34.2@144,1383 ; U6.8@199,1383 C34.2@144,1383 ; C46.P@199.5,1860 v1(253,1860) 281,1860 C47.P@309,1888 ; U9.10@215,1644 C44.2@215,1700 C45.2@215,1762 ; C46.P@215,1844.5 C45.2@215,1762 ; D7.C@273,1762 C45.2@215.5,1762 C45.2@215,1762 ; v1(405,736) 405,698 C35.2@409,694 ; R13.1@501,1866 507,1860 Q1.2@562,1860 v1(603,1860)
  Mid-Layer 1 w16: v1(-935,1040) -763,1040 -596,1207 v1(-409,1207) ; X2.1@-907,1673 -907,1619 -882,1594 v1(-849,1594) -741,1594 -682,1535 v1(-225,1535) -72,1535 v1(61,1668) v1(253,1860) v1(603,1860) ; v1(144,1422) v1(322,1422) ; v1(405,736) 425,756 v1(566,756)
  Mid-Layer 2 w16: v1(-597,1857) -597,1709 -527,1639 v1(-527,1535) -527,1227 v1(-547,1207) ; v1(-67,1989) -50,1972 v1(53,1972) 141,1972 v1(253,1860) 253,1702 231,1680 v1(231,1537) 231,1509 v1(144,1422) ; v1(322,1422) 322,928 X3.6@323,927 323,818 v1(405,736)
  Bottom Layer w16: U12.6@-935,990 v1(-935,1040)
3.3VUSB: C50.P C51.2 D4.A D8.C R20.1 R26.2 U8.C2 U10.16 | length 2170.1
  Top Layer w6: R20.1@628,632 v1(628,671) ; v1(725,661) D4.A@725,697
  Top Layer w12: v1(551,511) 551.2,510.8 U8.C2@551.2,483.6
  Top Layer w16: C50.P@-590,1077 -566,1101 v1(-536,1101) -495,1101 -487,1093 U10.16@-487,996 ; v1(-338,1101) R26.2@-279,1101 ; v1(-89,1167) D8.C@-89,1203
  Mid-Layer 1 w16: v1(-536,1101) v1(-338,1101) -278,1101 -212,1167 v1(-89,1167) -44,1122 -44,985 430,511 v1(551,511)
  Mid-Layer 2 w6: v1(551,511) 551,594 v1(628,671) 677,671 687,661 v1(725,661)
5VA: C7.2 C17.2 C18.2 C19.2 C20.2 C25.2 C26.P R2.2 R6.2 U1.8 U2.19 U2.21 U2.22 U2.54 U2.56 U2.59 U3.3 | length 2975.9
  Top Layer w10: C18.2@-533,2335 -519.3,2321.3 U2.19@-464,2321.3 ; U2.22@-464,2262.2 -522.2,2262.2 C17.2@-533,2273 -524.1,2281.9 U2.21@-464,2281.9 ; U2.54@-16,2163.8 -51.8,2163.8 -58,2170 -58,2197 -51.8,2203.2 U2.56@-16,2203.2 24.2,2203.2 35.8,2214.8 v1@35.8,2262.2 ; U2.59@-16,2262.2 v1@35.8,2262.2 ; v1(36,2262) v1@35.8,2262.2
  Top Layer w12: C7.2@-854,2266 v1(-854,2200) -853.6,2200.4 U1.8@-800,2200.4
  Top Layer w14: C17.2@-533,2273 C18.2@-533,2335 v1(-533,2373) ; v1(36,2262) C19.2@75,2262 C20.2@75,2324
  Top Layer w16: v1(-977,1896) R6.2@-977,1935 ; R2.2@254,2644 v1(254,2681) ; v1(255,2506) C26.P@255,2452 C25.2@353,2452 U3.3@414,2452
  Mid-Layer 1 w16: v1(-977,1896) -879,1994 -879,2175 v1(-854,2200) -681,2373 v1(-533,2373) -422,2262 v1(36,2262) 255,2481 v1(255,2506)
  Mid-Layer 2 w16: v1(254,2681) 254,2507 v1(255,2506)
5VIZO: C52.2 C54.P C55.2 C56.2 L2.1.1 U10.1 U10.6 U11.4 U11.19 U11.20 U12.1 U12.3 | length 673.4
  Top Layer w10: U11.19@-808,437 U11.20@-782.4,437 -782.4,514.6 v1(-782,515) ; v1(-655,639) -654.4,639.6 U11.4@-654.4,709
  Top Layer w16: C52.2@-493,533 -487,539 v1(-487,573) U10.1@-487,630 ; C54.P@-484,433 -453,402 v1(-430,402) ; v1(-309,468) L2.1.1@-262,468 -201,468 C56.2@-194,475 C55.2@-194,533 ; v1(-237,573) U10.6@-237,630
  Bottom Layer w10: v1(-935,586) U12.3@-935,636 ; v1(-745,590) -745,626 U12.1@-735,636